# Altium PCB MicAmp.PcbDoc
Units mm, origin at the board's own origin, x right, y up, seen from the top; angles counter-clockwise.
Board outline 51.5 x 16 mm, 2 copper layers (Top Layer, Bottom Layer), stack 1.572 mm thick; 31 components, 16 nets, 74 pads, 3 vias.
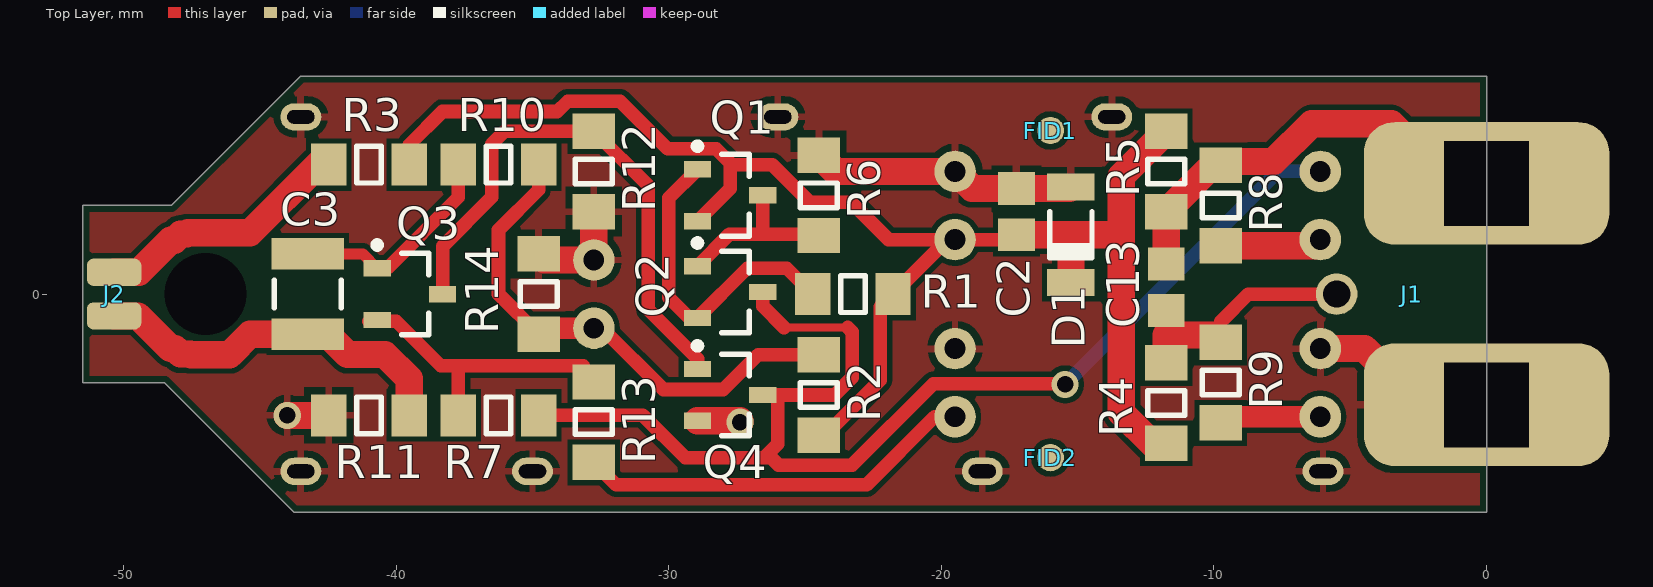
[diagram p0: Top Layer view]
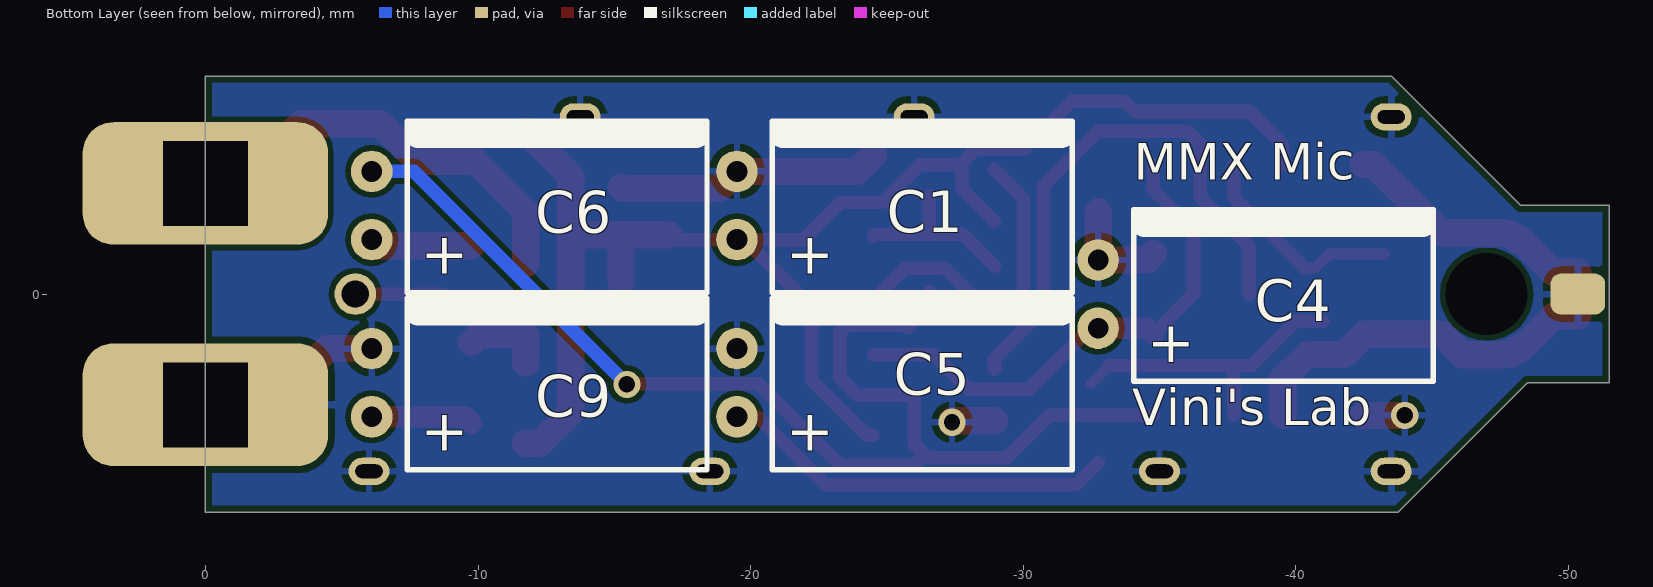
[diagram p1: Bottom Layer view, seen from below]
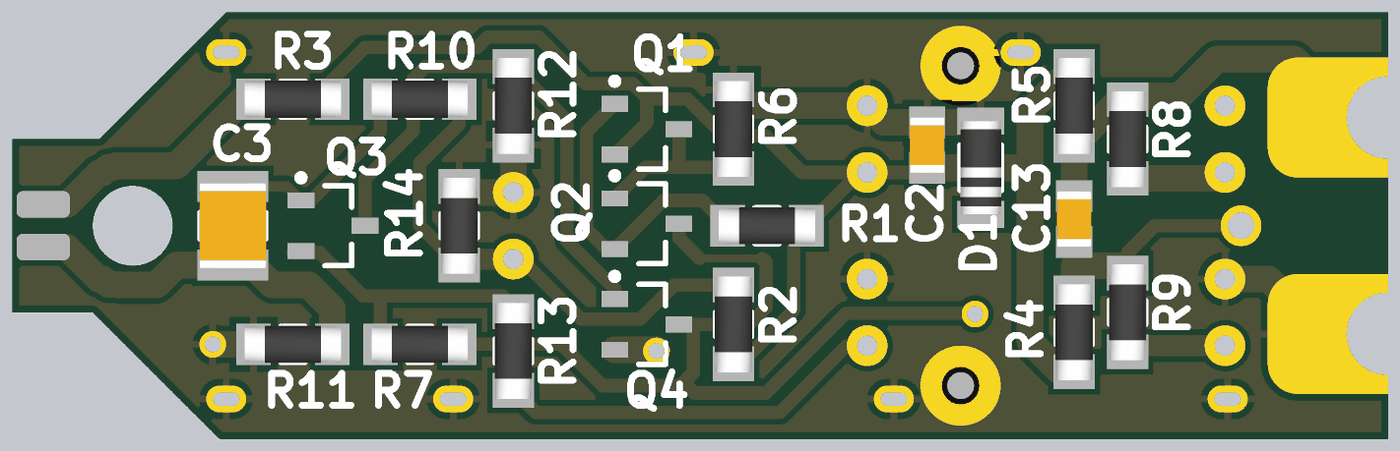
[diagram p2: 3D render of the assembled board from above, using the file's embedded part models]

## Layer stack, top to bottom
Top Solder: solder mask 0.0102, Solder Resist, Dk 3.5
Top Layer: signal copper 0.055
Dielectric 1: core 1.462, FR-4, Dk 4.2
Bottom Layer: signal copper 0.055
Bottom Solder: solder mask 0.0102, Solder Resist, Dk 3.5

## Board outline
-51.5,-3.25 -51.5,3.25 -48.25,3.25 -43.5,8 0,8 0,-8 -43.75,-8 -48.5,-3.25

## Design rules (kind name [scope] priority, off if disabled: settings)
BoardOutlineClearance [All] p1: gap=0.25 ignorepadtopadclearanceinfootprint=FALSE
Clearance [All] p1: gap=0.2 ignorepadtopadclearanceinfootprint=FALSE
ComponentClearance [All] p1: gap=0.05 collisioncheckmode=3 verticalgap=0.2 showdistances=FALSE
HoleSize [All] p1: absolutevalues=TRUE maxlimit=8 minlimit=0.3 maxpercent=80.000 minpercent=20.000
MinimumSolderMaskSliver [All] p1: minsoldermaskwidth=0.1
PlaneConnect [All] p1: planeconnectstyle=Relief reliefexpansion=0.508 reliefentries=4 reliefconductorwidth=0.5 reliefairgap=0.4
PolygonConnect [All] p1: connectstyle=Relief reliefconductorwidth=0.254 reliefentries=4 polygonreliefangle="90 Angle" airgapwidth=0.254
RoomDefinition PreAmp [InComponentClass('PreAmp')] p1: confinementstyle=ConfineIn formatcopy=TRUE lockcomponents=FALSE outline -51.75,-8.25 4.75,-8.25 4.75,8.25 -51.75,8.25
RoutingVias [All] p1: holewidth=0.711 width=1.27 viastyle="Through Hole" minholewidth=0.711 minwidth=1.27 maxholewidth=0.711 maxwidth=1.27
SilkToSilkClearance [All] p1: silktosilkclearance=0
SilkToSolderMaskClearance [IsPad] p1: minsilkscreentomaskgap=0.2 clearancetoexposedcopper=TRUE
SolderMaskExpansion [All] p1: expansion=0
Width [All] p1: maxlimit=1 minlimit=0.3 preferedwidth=0.3
24 further rules are at their usual default settings.

## Components (designator, comment, footprint, x,y, rotation, side; value= is the part's Value field where it differs from the comment)
C1 "33uF" UFW1J330MED -19.5,3.25 r180 bottom locked
C2 "0.1uF" C0805 -17.25,3.025 r90 top
C3 "1uF" C1210 -43.25,0 r90 top
C4 "33uF" UFW1J330MED -32.75,0 r180 bottom locked
C5 "33uF" UFW1J330MED -19.5,-3.25 r180 bottom locked
C6 "33uF" UFW1J330MED -6.1,3.25 r180 bottom
C9 "33uF" UFW1J330MED -6.1,-3.25 r180 bottom
C13 "1nF" C0805 -11.75,0.25 r270 top
D1 "10 Volts" SOD80C -15.25,2.175 r90 top
FID1 "FIDUCIAL" FIDUCIAL#1 -16.75,6.25 r0 top
FID2 "FIDUCIAL" FIDUCIAL#2 -16.75,-6 r90 top
J1 "XLR" XLR 0,0 r0 top locked
J2 "INPUT" INPUT -50.35,0 r0 top
Q1 "2SA1163" TO-236/SC-59/SOT-23 -27.75,3.625 r0 top
Q2 "2SA1163" TO-236/SC-59/SOT-23 -27.75,0.075 r0 top
Q3 "2SA1163" TO-236/SC-59/SOT-23 -39.5,0 r0 top
Q4 "2SC2713" TO-236/SC-59/SOT-23 -27.75,-3.7 r0 top
R1 "220R" MMA0204 -23.25,0 r180 top
R2 "100K" MMA0204 -24.5,-3.7 r270 top
R3 "5K6" MMA0204 -41,4.75 r180 top
R4 "2K2" MMA0204 -11.75,-4 r270 top
R5 "2K2" MMA0204 -11.75,4.5 r90 top
R6 "33K" MMA0204 -24.5,3.625 r270 top
R7 "33K" MMA0204 -36.25,-4.45 r0 top
R8 "100R" MMA0204 -9.75,3.25 r90 top
R9 "100R" MMA0204 -9.75,-3.25 r90 top
R10 "100K" MMA0204 -36.25,4.75 r180 top
R11 "5K6" MMA0204 -41,-4.45 r180 top
R12 "33K" MMA0204 -32.75,4.5 r90 top
R13 "10K" MMA0204 -32.75,-4.7 r90 top
R14 "33K" MMA0204 -34.775,0 r270 top

## Footprints (in the part's own frame and the unit in brackets; to place one, negate y for a bottom-side part, rotate by r counter-clockwise, add the part's x,y. Pads: shape width x height; smd on the part's side, far side on the other; paste and mask are expansions set on the pad)
C0805 [mm] "Chip Capacitor, 2-Leads, Body 2.00x1.20mm, IPC Medium Density"
  rect 1.2x1.35 smd: 1(-0.85,0) 2(0.85,0)
  body extent -1.05,-0.65 1.05,0.65, height 1
C1210 [mm] "Chip Capacitor, 2-Leads, Body 3.20x2.50mm, IPC Medium Density"
  rect 1.15x2.65 smd: 1(-1.475,0) 2(1.475,0)
  silkscreen extent -0.5,-1.22 0.5,1.23, body extent -1.6,-1.25 1.6,1.25, height 1.4
FIDUCIAL#1 [mm]
  round 1 smd mask+1: 8(0.75,-0.25)
FIDUCIAL#2 [mm]
  round 1 smd mask+1: 8(0,-0.75)
INPUT [mm]
  rrect50% 2x1.5 smd far side: 1(0,0)
  rrect50% 2x1 smd: 2(0,-0.8) 3(0,0.8)
MMA0204 [mm] "MELF Resistor, 2-Leads, Body 3.60x1.40mm, IPC High Density"
  rect 1.3x1.55 smd: 1(-1.475,0) 2(1.475,0)
  silkscreen extent -0.45,-0.67 0.45,0.67, body extent -1.8,-0.7 1.8,0.7, height 1.4
SOD80C [mm] "MELF Diode, 2-Leads, Body 3.50x1.53mm, IPC Medium Density"
  rect 1x1.75 smd: 1(-1.75,0) 2(1.75,0)
  silkscreen extent -0.85,-0.77 0.85,0.78, body extent -1.75,-0.76 1.75,0.76, height 1.53
TO-236/SC-59/SOT-23 [mm] "SOT23, 3-Leads, Body 2.90x2.45mm, Pitch 0.95mm, IPC Medium Density"
  rect 1x0.6 smd: 1(-1.2,0.95) 2(-1.2,-0.95) 3(1.2,0)
  silkscreen extent -1.32,-1.5 0.7,1.92, body extent -0.7,-1.5 0.7,1.5, height 1.1
UFW1J330MED [mil]
  round 60 hole 30: 1(0,-49.21) 2(0,49.21)
  silkscreen extent 51,-126 484,122, body extent 49,-124 482,124, height 242
XLR [mm]
  rrect50% 9x4.5 hole 3.1 square: 1(0,-4.06) 2(0,4.06)
  round 1.524 hole 1: 3(-5.5,0)

## Part data
C1 C4 C5 C6 C9: library part CE
C2 C3 C13: library part C
D1: library part BZV55B10
Q1 Q2 Q3: library part PNP
Q4: library part NPN
R1 R2 R3 R4 R5 R6 R7 R8 R9 R10 R11 R12 R13 R14: library part Resistor
  R1: Resistance=220R
  R2 R10: Resistance=100K
  R3 R11: Resistance=5K6
  R4 R5: Resistance=2K2
  R6 R7 R12 R14: Resistance=33K
  R8 R9: Resistance=100R
  R13: Resistance=10K

## Free pads (board coordinates)
  round 0 hole 3 unplated: 5(-47,0)
  oval 1.5x1 hole 0.5 slot 1 at 0 deg: ""(-43.5,-6.5) ""(-43.5,6.5) ""(-35,-6.5) ""(-26,6.5) ""(-18.5,-6.5) ""(-13.75,6.5) ""(-6,-6.5)

## Via types
v1: diameter 1, hole 0.6, Top Layer to Bottom Layer, 3 vias

## Nets (pads, with @x,y where several pads share a name; then routed paths per layer and width w, separated by ;. In a path a pad name is that pad's centre, name@x,y a point inside that pad or via, vN(x,y) a via of type N, cw(c..) or ccw(c..) an arc to the next point about the centre after c; other vN are vias at no path point)
GND: C1.2 C2.2 C4.2 C5.2 C9.2 D1.2 J1.1 J2.1 pad. Q4.2 R6.1 R11.2 R12.1 R14.1 | length 23.2
  Top Layer w1: v1(-44,-4.45) R11.2 ; R14.1 -34.55,1.25 C4.2 R12.1 ; Q4.2 -27.39,-4.65 v1(-27.39,-4.7) ; R6.1 -23.9,4.5 C1.2 -18.875,3.875 C2.2@-17,3.875 ; C2.2 -15.3,3.875 D1.2 ; C9.2@-6,-2 -4.475,-2 -2.415,-4.06 J1.1@-0.75,-4.06
NetC1_1: C1.1 C2.1 D1.1 Q1.2 R1.1 R2.2 R3.1 R4.2 R5.2 | length 56.4
  Top Layer w0.5: R3.1 -39.525,5.475 -38.303,6.697 -34.09,6.697 -33.711,7.075 -31.789,7.075 -30.039,5.325 -28.264,5.325 -27.75,4.811 -27.75,3.875 Q1.2 ; -27.689,4.75 -26.211,4.75 -24.836,3.375 -23.317,3.375 -21.942,2 C1.1@-19.775,2 ; R2.2 -24.265,-5.175 -22.25,-3.16 -22.25,-0.475 C1.1@-19.775,2 ; C2.1@-17,2.175 -17.175,2 C1.1 C1.1@-19.775,2
  Top Layer w1: C2.1@-17,2.175 -15.2,2.175 ; D1.1 -15.25,2.125 -15.2,2.175 ; R4.2 -12.275,-5.475 -13.4,-4.35 -13.4,2.175 ; R5.2 -13.4,4.325 -13.4,2.175 ; -15.2,2.175 -13.4,2.175
NetC3_1: C3.1 J2.2 R11.1 | length 13.7
  Top Layer w1: J2.2 -49.475,-0.8 -48.275,-2 -48.111,-2 -47.911,-2.2 -47.55,-2.2 -47.525,-2.225 -46.114,-2.225 -45.364,-1.475 C3.1 -42.525,-1.475 -41.781,-2.219 -40.412,-2.219 -39.525,-3.106 R11.1
NetC3_2: C3.2 Q3.1 R10.2 | length 8
  Top Layer w0.4: C3.2 -41.225,1.475 Q3.1 Q3.1@-40.325,0.95
  Top Layer w0.5: Q3.1@-40.325,0.95 -37.725,3.55 R10.2
NetC4_1: C4.1 R2.1 R10.1 R14.2 | length 19.3
  Top Layer w0.5: R14.2 -36.25,0 -36.25,2.35 -34.775,3.825 R10.1 ; C4.1@-32.45,-1.25 -30.2,-3.5 -28,-3.5 -26.725,-2.225 R2.1
  Top Layer w0.8: R14.2 -34.55,-1.25 C4.1 C4.1@-32.45,-1.25
NetC5_1: C5.1 R13.1 | length 15
  Top Layer w0.5: R13.1 -31.925,-7 -22.75,-7 -20.25,-4.5 C5.1 C5.1@-19.259,-4.259
NetC6_1: C6.1 R8.1 | length 3.8
  Top Layer w1: R8.1 -6.325,1.775 C6.1 C6.1@-6,2
NetC6_2: C6.2 Q2.3 Q4.3 R7.2 | length 45.4
  Top Layer w0.3: -25.775,-1.225 -23.439,-1.225
  Top Layer w0.5: R7.2 -30.95,-4.45 -29.4,-6 -26.5,-6 ; Q2.3 -26.55,-0.45 -25.775,-1.225 ; -23.439,-1.225 -23.275,-1.389 -23.275,-3.061 -23.914,-3.7 -26,-3.7 -26,-5.5 -26.5,-6 ; v1@-15.462,-3.288 -20.288,-3.288 -23.275,-6.275 -25.975,-6.275 -26.25,-6 -26.5,-6
  Bottom Layer w0.5: v1(-15.462,-3.313) -7.649,4.5 C6.2 C6.2@-6,4.5
NetC9_1: C9.1 R9.1 | length 3.8
  Top Layer w0.8: R9.1 -9.525,-4.5 C9.1@-6,-4.5
NetC13_1: C13.1 J1.2 R5.1 R8.2 | length 13
  Top Layer w1: C13.1 R5.1@-11.75,2.725 ; R5.1 -9.908,4.867 -7.801,4.867 -6.418,6.25 -3.5,6.25 J1.2@-2.25,5
NetC13_2: C13.2 J1.3 R4.1 R9.2 | length 7.8
  Top Layer w0.5: -9.745,-1.005 -8.74,0 J1.3
  Top Layer w1: R4.1 -11.75,-1.5 -10.025,-1.5 R9.2
NetJ2_3: J2.3 R3.2 | length 9.5
  Top Layer w1: J2.3 -49.45,0.8 -48.275,1.975 -48.137,1.975 -47.911,2.2 -47.686,2.2 -47.636,2.25 -45.365,2.25 -42.865,4.75 R3.2
NetQ1_1: Q1.1 Q2.2 R1.2 | length 11.9
  Top Layer w0.5: Q1.1 -30,3.525 -30,-0.125 -29.25,-0.875 Q2.2 -27.125,0.95 -25.675,0.95 R1.2
NetQ1_3: Q1.3 Q2.1 R6.2 | length 6.4
  Top Layer w0.5: Q2.1 -27.775,2.2 -26.55,2.2 ; Q1.3 -26.55,2.2 ; R6.2 -24.55,2.2 -26.55,2.2
NetQ3_2: Q3.2 R7.1 R13.2 | length 11.3
  Top Layer w0.4: R13.2@-33.144,-2.631 R13.2@-32.5,-3.275
  Top Layer w0.5: Q3.2@-41,-1 -40,-1 -38.369,-2.631 -37.725,-2.631 ; R7.1 -37.725,-2.631 ; R13.2@-33.144,-2.631 -37.725,-2.631
NetQ3_3: Q3.3 Q4.1 R12.2 | length 20.5
  Top Layer w0.5: Q3.3 -38.3,1.75 -36.5,3.55 -36.5,5.5 -36.025,5.975 R12.2 -30.75,3.975 -30.75,-0.574 -28.95,-2.374 Q4.1
pads on no net: FID1.8 FID2.8

## Polygon pours and split planes (outlines as drawn)
GND on Bottom Layer "Bottom Layer-GND" (solid, pour order 8): -51.5,3.25 -51.5,-3.25 -48.5,-3.25 -43.75,-8 0,-8 0,8 -43.5,8 -48.25,3.25
GND on Top Layer "Top Layer-GND" (solid, remove dead copper, pour order 10): 0,8 -43.5,8 -48.25,3.25 -51.5,3.25 -51.5,-3.225 -48.5,-3.225 -48.5,-3.25 -43.75,-8 0,-8

## Silkscreen, mask and mechanical layers (free items; w line width, h text height)
Bottom Overlay:
  text "MMX Mic" at -34.05,3.75 h2.3
  text "Vini's Lab" at -34,-5.25 h2.3
Mechanical 1:
  lines w0.2: -48.5,-3.25 -43.75,-8 0,-8 0,8 -43.5,8 -48.25,3.25 -48.5,3.25 -51.5,3.25 -51.5,-3.25 -48.5,-3.25 ; -48.5,-3.25 -48.5,-3.25

## Text inside footprints (layer, text, board x,y; h text height)
C1: Bottom Overlay "+" at -21.3,0.75 h1.52
C4: Bottom Overlay "+" at -34.55,-2.5 h1.52
C5: Bottom Overlay "+" at -21.3,-5.75 h1.52
C6: Bottom Overlay "+" at -7.9,0.75 h1.52
C9: Bottom Overlay "+" at -7.9,-5.75 h1.52